# Altium PCB BRAKE PCB PROFILE (Right) V2.PcbDoc
Units mil, origin at the board's own origin, x right, y up, seen from the top; angles counter-clockwise.
Board outline 7818.87 x 3566.84 mil, 2 copper layers (Top Layer, Bottom Layer); 68 components, 67 nets, 266 pads, 5 vias.
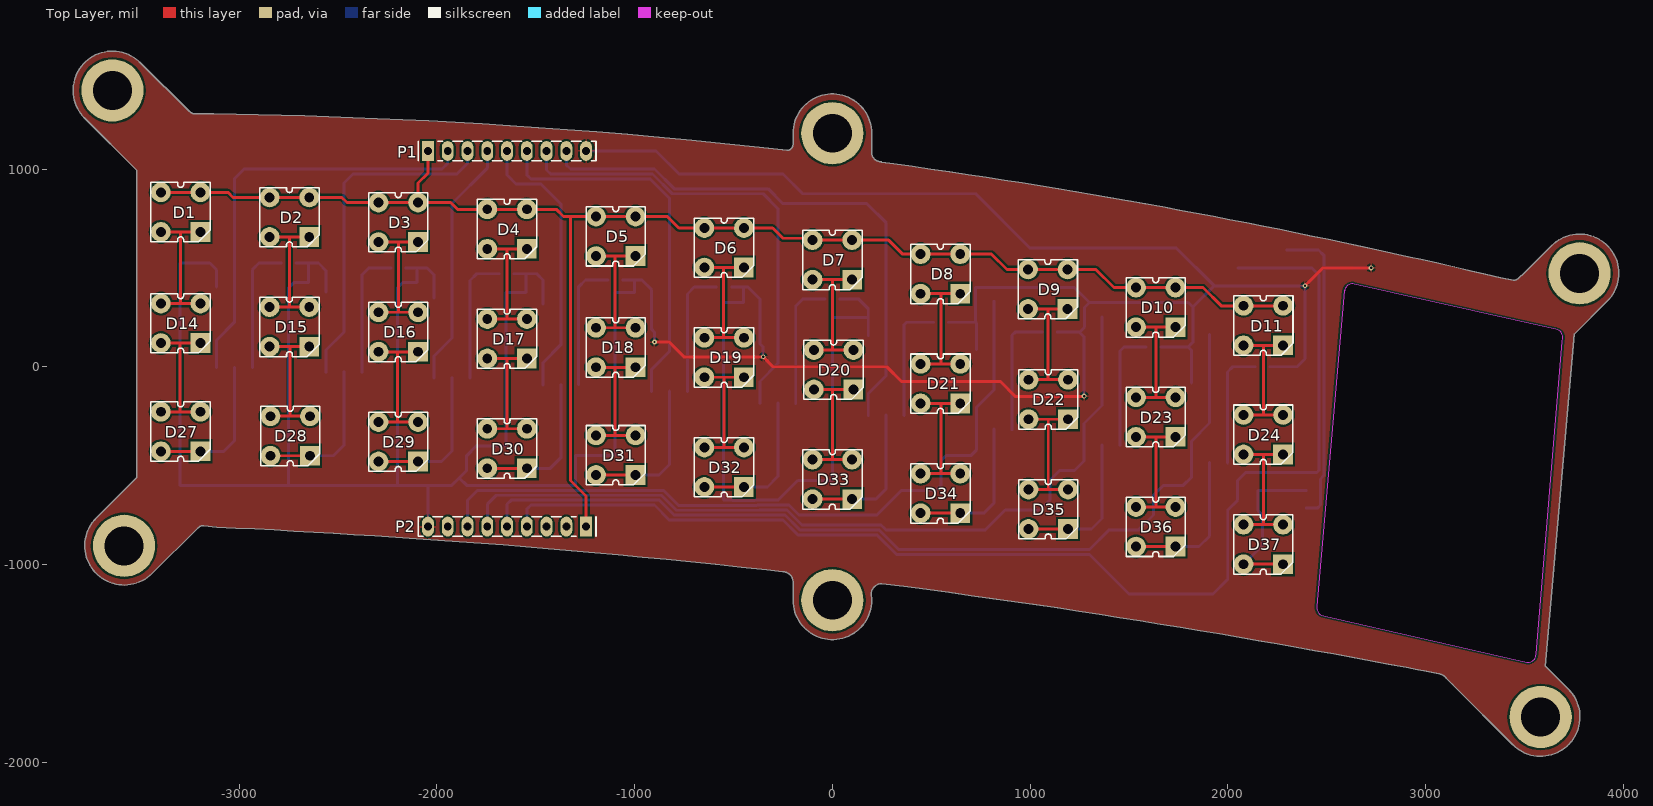
[diagram p0: Top Layer view]
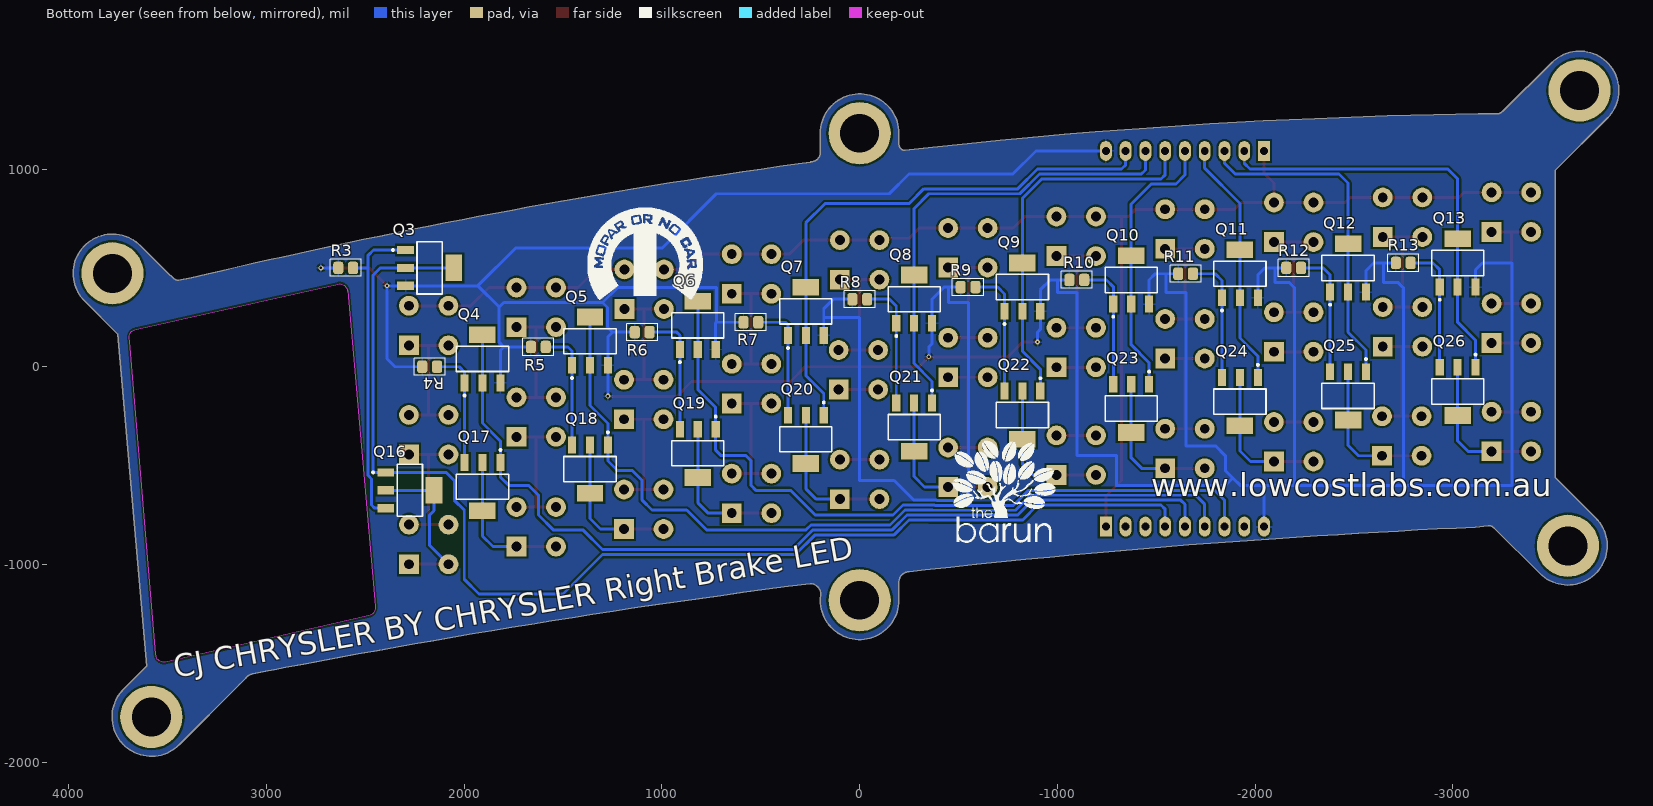
[diagram p1: Bottom Layer view, seen from below]
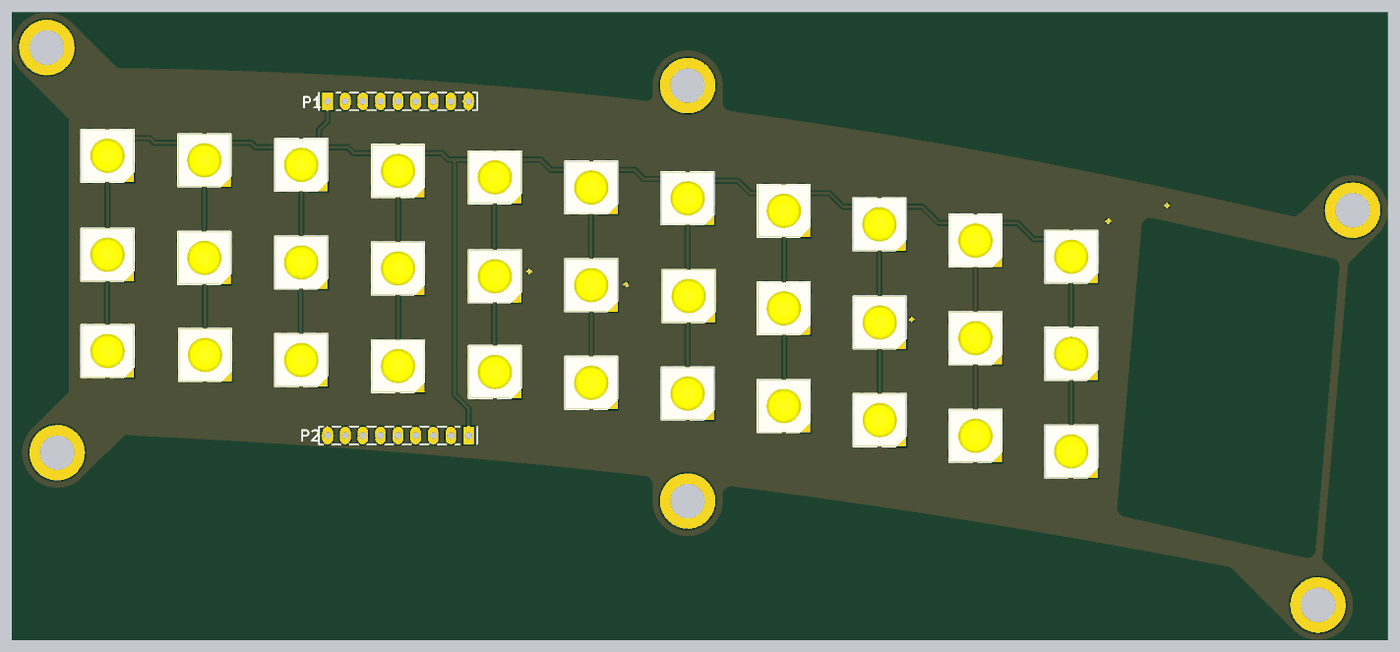
[diagram p2: 3D render of the assembled board from above, using the file's embedded part models]
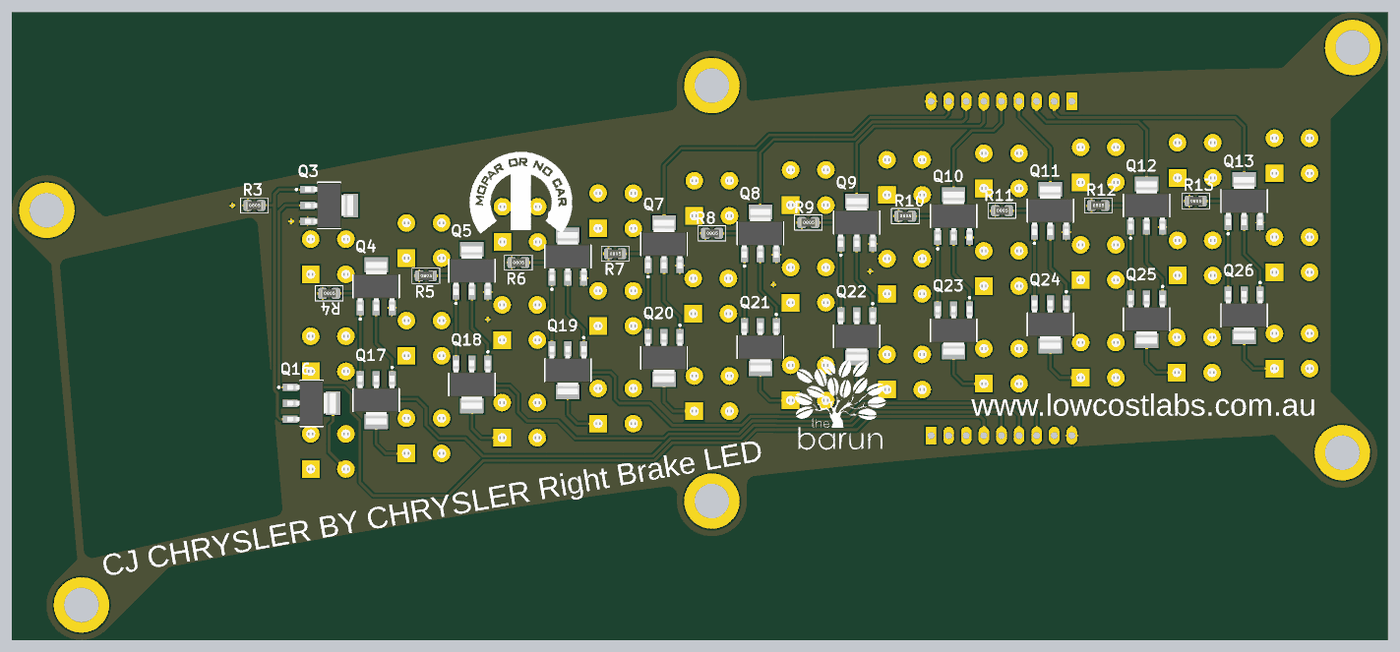
[diagram p3: 3D render of the assembled board from below, using the file's embedded part models]

## Layer stack, top to bottom
Top Solder: solder mask 0.4, Solder Resist, Dk 3.5
Top Layer: signal copper 1.4
Dielectric 1: dielectric 12.6, FR-4, Dk 4.8
Bottom Layer: signal copper 1.4
Bottom Solder: solder mask 0.4, Solder Resist, Dk 3.5

## Board outline
401 vertices, not listed, extent -3840.52,-1970.41 3978.35,1596.43
cut-out: 2476.18,-1256.86 2495.59,-1262.41 3512.96,-1493.74 ccw(c3520,-1455) 3559.37,-1455 3692.71,130.19 3693.83,143.53 ccw(c3655,150) 3659.88,189.07 3645.71,193.19 2639.55,418.19 ccw(c2630,380) 2590.93,384.88 2590,384.96 2451.39,-1212.28 ccw(c2490,-1220)

## Design rules (kind name [scope] priority, off if disabled: settings)
Clearance [All] p1: gap=10
PolygonConnect [All] p1: connectstyle=Relief reliefconductorwidth=10 reliefentries=4 polygonreliefangle="90 Angle" airgapwidth=10
RoomDefinition Indicator [InComponentClass('Indicator')] p1: confinementstyle=ConfineIn formatcopy=TRUE lockcomponents=FALSE outline -4345,-2195 5215,-2195 5215,2075 -4345,2075
RoutingVias [All] p1: holewidth=28 width=50 viastyle="Through Hole" minholewidth=12 minwidth=24 maxholewidth=28 maxwidth=50
SolderMaskExpansion [All] p1: expansion=4
Width [All] p1: maxlimit=100 minlimit=10 preferedwidth=10
30 further rules are at their usual default settings.

## Components (designator, comment, footprint, x,y, rotation, side; value= is the part's Value field where it differs from the comment)
D1 "AMBER" "CREE P4 YELLOW" -3296.96,782.24 r180 top
D2 "AMBER" "CREE P4 YELLOW" -2746.38,756.42 r180 top
D3 "AMBER" "CREE P4 YELLOW" -2195.81,730.61 r180 top
D4 "AMBER" "CREE P4 YELLOW" -1645.69,696.46 r180 top
D5 "AMBER" "CREE P4 YELLOW" -1095.52,659.72 r180 top
D6 "AMBER" "CREE P4 YELLOW" -547.76,601.72 r180 top
D7 "AMBER" "CREE P4 YELLOW" 0,540.4 r180 top
D8 "AMBER" "CREE P4 YELLOW" 546.6,469.46 r180 top
D9 "AMBER" "CREE P4 YELLOW" 1090,392.31 r180 top
D10 "AMBER" "CREE P4 YELLOW" 1635.86,300.24 r180 top
D11 "AMBER" "CREE P4 YELLOW" 2180,208.31 r180 top
D14 "AMBER" "CREE P4 YELLOW" -3296.96,219.72 r180 top
D15 "AMBER" "CREE P4 YELLOW" -2746.38,201.54 r180 top
D16 "AMBER" "CREE P4 YELLOW" -2195.81,175.73 r180 top
D17 "AMBER" "CREE P4 YELLOW" -1645.69,141.58 r180 top
D18 "AMBER" "CREE P4 YELLOW" -1095.52,97.21 r180 top
D19 "AMBER" "CREE P4 YELLOW" -547.76,46.84 r180 top
D20 "AMBER" "CREE P4 YELLOW" 6.11,-15.28 r180 top
D21 "AMBER" "CREE P4 YELLOW" 546.6,-85.42 r180 top
D22 "AMBER" "CREE P4 YELLOW" 1091.91,-165.64 r180 top
D23 "AMBER" "CREE P4 YELLOW" 1635.86,-254.65 r180 top
D24 "AMBER" "CREE P4 YELLOW" 2179.8,-343.65 r180 top
D27 "AMBER" "CREE P4 YELLOW" -3296.96,-327.91 r180 top
D28 "AMBER" "CREE P4 YELLOW" -2742.54,-350.23 r180 top
D29 "AMBER" "CREE P4 YELLOW" -2195.81,-379.54 r180 top
D30 "AMBER" "CREE P4 YELLOW" -1645.69,-413.68 r180 top
D31 "AMBER" "CREE P4 YELLOW" -1095.52,-447.11 r180 top
D32 "AMBER" "CREE P4 YELLOW" -547.76,-508.43 r180 top
D33 "AMBER" "CREE P4 YELLOW" 0,-569.75 r180 top
D34 "AMBER" "CREE P4 YELLOW" 546.6,-640.69 r180 top
D35 "AMBER" "CREE P4 YELLOW" 1091.91,-720.91 r180 top
D36 "AMBER" "CREE P4 YELLOW" 1635.86,-809.91 r180 top
D37 "AMBER" "CREE P4 YELLOW" 2179.8,-898.92 r180 top
P1 "Header 9" "HEADER 1x9" -1645.69,1091.58 r0 top
P2 "Header 9" "HEADER 1x9" -1645.69,-808.42 r180 top
Q3 "BCP56" SOT223 2175,500 r270 bottom
Q4 "BCP56" SOT223 1907.82,40.05 r180 bottom
Q5 "BCP56" SOT223 1363.87,129.05 r180 bottom
Q6 "BCP56" SOT223 818.56,209.27 r180 bottom
Q7 "BCP56" SOT223 271.96,280.21 r180 bottom
Q8 "BCP56" SOT223 -275.8,341.53 r180 bottom
Q9 "BCP56" SOT223 -823.56,402.85 r180 bottom
Q10 "BCP56" SOT223 -1373.73,439.23 r180 bottom
Q11 "BCP56" SOT223 -1923.85,470.42 r180 bottom
Q12 "BCP56" SOT223 -2470.58,499.72 r180 bottom
Q13 "BCP56" SOT223 -3025,525 r180 bottom
Q16 "BCP56" SOT223 2275,-625 r270 bottom
Q17 "BCP56" SOT223 1907.82,-607 r0 bottom
Q18 "BCP56" SOT223 1363.87,-518 r0 bottom
Q19 "BCP56" SOT223 818.56,-437.78 r0 bottom
Q20 "BCP56" SOT223 271.96,-366.84 r0 bottom
Q21 "BCP56" SOT223 -275.8,-305.52 r0 bottom
Q22 "BCP56" SOT223 -823.56,-244.2 r0 bottom
Q23 "BCP56" SOT223 -1373.73,-210.77 r0 bottom
Q24 "BCP56" SOT223 -1923.85,-176.63 r0 bottom
Q25 "BCP56" SOT223 -2470.58,-147.32 r0 bottom
Q26 "BCP56" SOT223 -3025,-125 r0 bottom
R3 "9R1" "RESISTOR 0805" 2600,500 r180 bottom
R4 "9R1" "RESISTOR 0805" 2175,0 r180 bottom
R5 "9R1" "RESISTOR 0805" 1625,100 r180 bottom
R6 "9R1" "RESISTOR 0805" 1100,175 r180 bottom
R7 "9R1" "RESISTOR 0805" 550,225 r180 bottom
R8 "9R1" "RESISTOR 0805" -0.8,341.53 r180 bottom
R9 "9R1" "RESISTOR 0805" -548.56,402.85 r180 bottom
R10 "9R1" "RESISTOR 0805" -1098.73,439.23 r180 bottom
R11 "9R1" "RESISTOR 0805" -1648.85,470.42 r180 bottom
R12 "9R1" "RESISTOR 0805" -2195.58,499.72 r180 bottom
R13 "9R1" "RESISTOR 0805" -2750,525 r180 bottom

## Footprints (in the part's own frame and the unit in brackets; to place one, negate y for a bottom-side part, rotate by r counter-clockwise, add the part's x,y. Pads: shape width x height; smd on the part's side, far side on the other; paste and mask are expansions set on the pad)
"CREE P4 YELLOW" [mil] "CREE P4 YELLOW"
  rect 100x100 hole 50: 1(-100,100)
  round 100 hole 50: 2(-100,-100) 3(100,-100) 4(100,100)
  silkscreen extent -150,-150 150,150, body extent -150,-150 150,150, height 272
"HEADER 1x9" [mil]
  rect 60x100 hole 40: 1(-400,0)
  oval 60x100 hole 40: 2(-300,0) 3(-200,0) 4(-100,0) 5(0,0) 6(100,0) 7(200,0) 8(300,0) 9(400,0)
  silkscreen extent -450,-50 450,50
"RESISTOR 0805" [mm]
  rrect50% 1.3x1.6 smd: 1(-0.95,0) 2(0.95,0)
  silkscreen extent -2,-1.1 2,1.1, body extent -1.25,-0.62 1.25,0.62, height 0.8
SOT223 [mm] "SOT-223/SC-73; 4 Leads; Body 6.7 x 7.3 mm, inc. leads (LxW max)"
  rect 1.05x2.15 smd: 1(-2.3,-3.1) 2(0,-3.1) 3(2.3,-3.1)
  rect 3.4x2.15 smd: 2(0,3.1)
  silkscreen extent -3.35,-4.85 3.35,1.62, body extent -3.25,-3.5 3.25,3.5, height 1.67

## Part data
D1 D2 D3 D4 D5 D6 D7 D8 D9 D10 D11 D14 D15 D16 D17 D18 D19 D20 D21 D22 D23 D24 D27 D28 D29 D30 D31 D32 D33 D34 D35 D36 D37: library part CP41B-AFSCM0Q0264, "CREE AMBER LED P4 (SUPERFLUX)"
P1 P2: "Header, 9-Pin"
Q3 Q4 Q5 Q6 Q7 Q8 Q9 Q10 Q11 Q12 Q13 Q16 Q17 Q18 Q19 Q20 Q21 Q22 Q23 Q24 Q25 Q26: library part NPN, "BCP56 80 V, 1 A NPN medium power transistors"
R3 R4 R5 R6 R7 R8 R9 R10 R11 R12 R13: library part Res2, "Resistor"

## Free pads (board coordinates)
  round 314.96 hole 196.85 unplated: MOUNT(-3641.73,1397.64) MOUNT(-3582.99,-905.93) MOUNT(0,-1181.1) MOUNT(0,1181.1) MOUNT(3582.68,-1771.65) MOUNT(3779.53,472.44)

## Via types
v1: diameter 24, hole 12, Top Layer to Bottom Layer, 5 vias

## Nets (pads, with @x,y where several pads share a name; then routed paths per layer and width w, separated by ;. In a path a pad name is that pad's centre, name@x,y a point inside that pad or via, vN(x,y) a via of type N, cw(c..) or ccw(c..) an arc to the next point about the centre after c; other vN are vias at no path point)
DRIVE_0: P1.2 Q13.2 Q26.1 | length 2164.9
  Bottom Layer w15: Q26.1 -3115.55,134.45 -3025,225 -3025,402.95 -3025,647.05 -3025,950 -2975,1000 -1975,1000 -1945.69,1029.31 P1.2
DRIVE_1: P1.3 Q12.2 Q25.1 | length 1723.7
  Bottom Layer w15: Q25.1@-2561.13,-28.23 -2561.13,84.17 -2470.58,174.72 -2470.58,377.68 -2470.58,621.77 -2470.58,929.42 -2425,975 -1900,975 -1845.69,1029.31 P1.3
DRIVE_2: P1.4 Q11.2 Q24.1 | length 1260.4
  Bottom Layer w15: Q24.1@-2014.4,-57.53 -2014.4,54.87 -1923.85,145.42 -1923.85,348.37 -1923.85,592.47 -1923.85,826.15 -1745.69,1004.31 P1.4
DRIVE_3: P1.5 Q10.2 Q23.1 | length 1403.7
  Bottom Layer w15: P1.5 -1645.69,970.69 -1600,925 -1475,925 -1373.73,823.73 -1373.73,561.27 Q10.2@-1373.73,317.18 ; Q23.1@-1464.28,-91.68 -1464.28,20.72 -1373.73,111.27 Q10.2@-1373.73,314.23
DRIVE_4: P1.6 Q9.2 Q22.1 | length 1907.3
  Bottom Layer w15: P1.6 -1545.69,970.69 -1525,950 -920.71,950 -823.56,852.85 -823.56,524.9 -823.56,280.8 -823.56,77.85 -914.11,-12.7 Q22.1@-914.11,-125.1
DRIVE_5: P1.7 Q8.2 Q21.1 | length 2371.2
  Bottom Layer w15: P1.7 -1445.69,995.69 -1425,975 -910.36,975 -810.36,875 -350,875 -275.8,800.8 -275.8,463.58 -275.8,219.48 -275.8,16.53 -366.35,-74.02 Q21.1@-366.35,-186.42
DRIVE_6: P1.8 Q7.2 Q20.1 | length 2823
  Bottom Layer w15: P1.8 -1345.69,1020.69 -1325,1000 -900,1000 -800,900 -325,900 -250,825 175,825 271.96,728.04 271.96,402.26 271.96,158.16 271.96,-44.79 181.41,-135.34 Q20.1@181.41,-247.74
DRIVE_7: P2.7 Q6.2 Q19.1 | length 3780.3
  Bottom Layer w15: P2.7 -1845.69,-675 -1795.69,-625 -854.29,-625 -778.36,-700.93 -380.16,-700.93 -379.23,-700 -218.93,-700 -168.93,-750 225,-750 350,-625 525,-625 550,-600 550,-475 575,-450 700,-450 728.01,-421.99 Q19.1 728.01,-206.28 818.56,-115.73 818.56,87.22 Q6.2@818.56,331.32
DRIVE_8: P2.6 Q5.2 Q18.1 | length 4192.1
  Bottom Layer w15: P2.6 -1745.69,-695.69 -1700,-650 -864.64,-650 -788.72,-725.93 -369.8,-725.93 -368.87,-725 -229.29,-725 -154.29,-800 245.71,-800 270.71,-825 775,-825 875,-725 1050,-725 1100,-675 1100,-575 1150,-525 1225,-525 1273.32,-476.68 Q18.1 1273.32,-286.5 1363.87,-195.95 1363.87,7 Q5.2@1363.87,251.1
DRIVE_9: P2.5 Q4.2 Q17.1 | length 4656.6
  Bottom Layer w15: P2.5 -1645.69,-695.69 -1625,-675 -875,-675 -799.07,-750.93 -359.44,-750.93 -358.52,-750 -239.64,-750 -164.64,-825 235.36,-825 335.36,-925 1300,-925 1400,-825 1550,-825 1625,-750 1625,-650 1675,-600 1775,-600 1817.26,-557.74 Q17.1 1817.26,-375.51 1907.82,-284.95 1907.82,-82 Q4.2@1907.82,162.09
DRIVE_10: P2.4 Q3.2 Q16.1 | length 6224.4
  Bottom Layer w15: P2.4 -1545.69,-720.69 -1525,-700 -900,-700 -824.07,-775.93 -349.09,-775.93 -348.16,-775 -250,-775 -175,-850 225,-850 325,-950 1300,-950 1500,-1150 1925,-1150 2000,-1075 2000,-725 2050,-675 2050,-575 2090.55,-534.45 Q16.1 2451.42,-534.45 2460.87,-525 2460.87,464.13 2425,500 2297.05,500 Q3.2@2052.95,500
DRIVE_11: P2.3
DRIVE_12: P2.2
GND: P1.9 P2.9 Q3.3 Q4.3 Q5.3 Q6.3 Q7.3 Q8.3 Q9.3 Q10.3 Q11.3 Q12.3 Q13.3 R3.1 R4.1 R5.1 R6.1 R7.1 R8.1 R9.1 R10.1 R11.1 R12.1 R13.1 | length 23642.8
  Top Layer w15: v1(-900,125) -825,125 -750,50 v1(-350,50) -300,0 275,0 350,-75 850,-75 925,-150 v1@1273.32,-150 ; v1(2390.55,409.45) 2481.1,500 v1(2725,500)
  Bottom Layer w15: Q13.3 -3115.55,490.55 -3150,525 -3300,525 -3300,-600 -2750,-600 ; R13.1 -2650,525 ; Q12.3 -2561.13,486.13 -2600,525 -2650,525 ; R12.1 -2100,499.72 ; P2.9 -2045.69,-604.31 ; Q11.3 -2014.4,464.4 -2049.72,499.72 -2100,499.72 ; R11.1 -1550,470.42 ; Q10.3 -1464.28,439.28 -1495.42,470.42 -1550,470.42 ; P1.9 -891.58,1091.58 -775,975 -250,975 -150,875 725,875 1000,600 1740.68,600 1931.23,409.45 ; R10.1 -1000,439.23 ; v1(-900,125) -900,175 -914.11,189.11 Q9.3 -914.11,389.11 -964.23,439.23 -1000,439.23 ; R9.1 -450,402.85 ; v1(-350,50) -350,100 -366.35,116.35 Q8.3 -366.35,341.35 -427.85,402.85 -450,402.85 ; R8.1 133.47,341.53 181.41,293.59 181.41,250 ; Q7.3 181.41,250 ; R7.1 725,225 ; Q6.3 728.01,221.99 725,225 ; R6.1 1250,175 ; v1(1273.32,-148.32) Q5.3 1273.32,151.68 1250,175 ; R5.1 1800,100 ; Q4.3 1817.27,82.73 1800,100 ; R4.1 2350,0 2390.55,40.55 v1(2390.55,409.45) Q3.3 1931.23,409.45 ; R3.1 v1(2725,500) ; -2750,-600 -2200,-600 ; -2750,-600 -2750,400 -2725,425 -2650,425 -2650,525 ; -2200,-600 -1925,-600 -1887.5,-562.5 ; -2200,-600 -2200,400 -2175,425 -2100,425 -2100,499.72 ; -1887.5,-562.5 -1850,-525 -1850,-450 -1800,-400 -1650,-400 -1650,375 -1550,375 -1550,470.42 ; -1887.5,-562.5 -1850,-600 -1300,-600 -1300,-450 -1100,-450 -1100,375 -1000,375 -1000,439.23 ; -450,402.85 -450,325 -550,325 -550,-675 -505.93,-675 -505.01,-675.93 -390.51,-675.93 -389.58,-675 -275,-675 -175,-575 0,-575 0,250 181.41,250 ; 725,225 725,400 1225,400 1300,325 ; 1250,175 1275,200 1275,300 1300,325 ; 1300,325 1800,325 1823.39,301.61 ; 1800,100 1823.39,123.39 1823.39,301.61 ; 1823.39,301.61 1931.23,409.45
NetD1_1: D1.1 D1.4 D14.2 D14.3 | length 762.5
  Top Layer w15: D14.3 -3296.96,319.72 ; D1.4 -3296.96,682.24 ; D14.2 -3296.96,319.72 ; D1.1 -3296.96,682.24 ; -3296.96,319.72 -3296.96,682.24
NetD2_1: D2.1 D2.4 D15.2 D15.3 | length 751.3
  Top Layer w15: D15.3 -2746.38,301.54 ; D2.4 D2.1 ; -2746.38,652.81 -2746.38,301.54 ; D15.2 -2746.38,301.54
NetD3_1: D3.1 D3.4 D16.2 D16.3 | length 750.7
  Top Layer w15: D16.3 D16.2 ; D3.4 -2195.81,630.61 ; -2195.81,279.92 -2195.81,630.61 ; D3.1 -2195.81,630.61
NetD4_1: D4.1 D4.4 D17.2 D17.3 | length 754.9
  Top Layer w15: D17.3 -1645.69,241.58 ; D4.4 -1645.69,596.46 ; D17.2 -1645.69,241.58 ; D4.1 -1645.69,596.46 ; -1645.69,241.58 -1645.69,596.46
NetD5_1: D5.1 D5.4 D18.2 D18.3 | length 762.5
  Top Layer w15: D18.3 -1100,197.21 ; D5.4 -1100,559.72 ; D18.2 -1100,197.21 ; D5.1 -1100,559.72 ; -1100,197.21 -1100,559.72
NetD6_1: D6.1 D6.4 D19.2 D19.3 | length 752.6
  Top Layer w15: D19.3 D19.2 ; D6.4 -550,501.72 ; -550,149.08 -550,501.72 ; D6.1 -550,501.72
NetD7_1: D7.1 D7.4 D20.2 D20.3 | length 755.7
  Top Layer w15: D7.4 0,440.4 ; D20.3 0,84.72 ; D7.1 0,440.4 ; D20.2 0,84.72 ; 0,84.72 0,440.4
NetD8_1: D8.1 D8.4 D21.2 D21.3 | length 754.9
  Top Layer w15: D21.3 550,14.58 ; D8.4 550,369.46 ; D21.2 550,14.58 ; D8.1 550,369.46 ; 550,14.58 550,369.46
NetD9_1: D9.1 D9.4 D22.2 D22.3 | length 756
  Top Layer w15: D9.4 1090,292.31 ; D22.3 D22.2 ; 1090,-63.73 1090,292.31 ; D9.1 1090,292.31
NetD10_1: D10.1 D10.4 D23.2 D23.3 | length 754.9
  Top Layer w15: D23.3 1635.86,-154.65 ; D10.4@1535.86,200 1635.86,200 ; D23.2 1635.86,-154.65 ; D10.1 1635.86,200.24 1635.86,200 ; 1635.86,-154.65 1635.86,200
NetD11_1: D11.1 D11.4 D24.2 D24.3 | length 751.8
  Top Layer w15: D24.3 D24.2 ; D11.4 2180,108.31 ; 2180,-243.46 2180,108.31 ; D11.1 2180,108.31
NetD12_1: 
NetD13_1: 
NetD14_1: D14.1 D14.4 D27.2 D27.3 | length 744.6
  Top Layer w15: D27.3 -3300,-227.91 ; D14.4 D14.1 ; -3300,116.68 -3300,-227.91 ; D27.2 -3300,-227.91
NetD15_1: D15.1 D15.4 D28.2 D28.3 | length 747.9
  Top Layer w15: D15.4 D15.1 ; D28.3 -2742.54,-250.23 ; -2742.54,97.7 -2742.54,-250.23 ; D28.2 -2742.54,-250.23
NetD16_1: D16.1 D16.4 D29.2 D29.3 | length 751.1
  Top Layer w15: D29.3 D29.2 ; D16.4 -2200,75.73 ; -2200,-275.34 -2200,75.73 ; D16.1 -2200,75.73
NetD17_1: D17.1 D17.4 D30.2 D30.3 | length 755.3
  Top Layer w15: D30.3 -1645.69,-313.68 ; D17.4 -1645.69,41.58 ; D30.2 -1645.69,-313.68 ; D17.1 -1645.69,41.58 ; -1645.69,-313.68 -1645.69,41.58
NetD18_1: D18.1 D18.4 D31.2 D31.3 | length 744.3
  Top Layer w15: D31.3 -1100,-347.11 ; D18.4 -1100,-2.79 ; D31.2 -1100,-347.11 ; D18.1 -1100,-2.79 ; -1100,-347.11 -1100,-2.79
NetD19_1: D19.1 D19.4 D32.2 D32.3 | length 753
  Top Layer w15: D32.3 -547.76,-408.43 ; D19.4 D19.1 ; -547.76,-55.4 -547.76,-408.43 ; D32.2 -547.76,-408.43
NetD20_1: D20.1 D20.4 D33.2 D33.3 | length 754.5
  Top Layer w15: D33.3 0,-469.75 ; D20.4 0,-115.28 ; D33.2 0,-469.75 ; D20.1 0,-115.28 ; 0,-469.75 0,-115.28
NetD21_1: D21.1 D21.4 D34.2 D34.3 | length 755.3
  Top Layer w15: D34.3 550,-540.69 ; D21.4 550,-185.42 ; D34.2 550,-540.69 ; D21.1 550,-185.42 ; 550,-540.69 550,-185.42
NetD22_1: D22.1 D22.4 D35.2 D35.3 | length 755.3
  Top Layer w15: D35.3 1091.91,-620.91 ; D22.4 1091.91,-265.64 ; D35.2 1091.91,-620.91 ; D22.1 1091.91,-265.64 ; 1091.91,-620.91 1091.91,-265.64
NetD23_1: D23.1 D23.4 D36.2 D36.3 | length 755.3
  Top Layer w15: D36.3 1635.86,-709.91 ; D23.4 1635.86,-354.65 ; D36.2 1635.86,-709.91 ; D23.1 1635.86,-354.65 ; 1635.86,-709.91 1635.86,-354.65
NetD24_1: D24.1 D24.4 D37.2 D37.3 | length 755.3
  Top Layer w15: D37.3 2179.8,-798.92 ; D24.4 2179.8,-443.65 ; D37.2 2179.8,-798.92 ; D24.1 2179.8,-443.65 ; 2179.8,-798.92 2179.8,-443.65
NetD25_1: 
NetD26_1: 
NetQ1_1: 
NetQ2_1: 
NetQ3_1: Q3.1 Q16.3 R3.2 | length 1625.7
  Bottom Layer w15: Q3.1 2459.45,590.55 2485.87,564.13 2485.87,500 ; Q16.3 2453,-715.55 2468.55,-700 2468.55,-567.33 2485.87,-550 2485.87,500 ; R3.2 2485.87,500
NetQ4_1: Q4.1 Q17.3 R4.2 | length 611.5
  Bottom Layer w15: Q17.3@1998.37,-487.9 Q4.1 1998.37,-26.63 2025,0 R4.2
NetQ5_1: Q5.1 Q18.3 R5.2 | length 620
  Bottom Layer w15: Q18.3@1454.42,-398.9 Q5.1 1454.42,79.42 1475,100 R5.2
NetQ6_1: Q6.1 Q19.3 R6.2 | length 637.9
  Bottom Layer w15: Q19.3@909.11,-318.68 Q6.1 909.11,159.11 925,175 R6.2
NetQ7_1: Q7.1 Q20.3 R7.2 | length 615.5
  Bottom Layer w15: Q20.3@362.51,-247.74 Q7.1 362.51,212.51 375,225 R7.2
NetQ8_1: Q8.1 Q21.3 R8.2 | length 654.8
  Bottom Layer w15: Q21.3@-185.25,-186.42 Q8.1 -185.25,307.08 -150.8,341.53 R8.2
NetQ9_1: Q9.1 Q22.3 R9.2 | length 654.8
  Bottom Layer w15: Q22.3@-733.01,-125.1 Q9.1 -733.01,368.4 -698.56,402.85 R9.2
NetQ10_1: Q10.1 Q23.3 R10.2 | length 654.8
  Bottom Layer w15: Q23.3 Q10.1 -1283.17,404.78 -1248.73,439.23 R10.2
NetQ11_1: Q11.1 Q24.3 R11.2 | length 654.8
  Bottom Layer w15: Q24.3@-1833.3,-57.53 Q11.1 -1833.3,435.97 -1798.85,470.42 R11.2
NetQ12_1: Q12.1 Q25.3 R12.2 | length 654.8
  Bottom Layer w15: Q25.3@-2380.03,-28.23 Q12.1 -2380.03,465.28 -2345.58,499.72 R12.2
NetQ13_1: Q13.1 Q26.3 R13.2 | length 654.8
  Bottom Layer w15: Q26.3 Q13.1 -2934.45,490.55 -2900,525 R13.2
SINK_0: D27.1 D27.4 Q26.2 | length 765.9
  Top Layer w15: D27.4 D27.1
  Bottom Layer w15: D27.1 -3077.91,-427.91 -3025,-375 -3025,-247.05 Q26.2@-3025,-2.95
SINK_1: D28.1 D28.4 Q25.2 | length 965.9
  Top Layer w15: D28.4 D28.1 D28.4
  Bottom Layer w15: D28.1 -2523.49,-450.23 -2470.58,-397.32 -2470.58,-269.37 Q25.2@-2470.58,-25.28
SINK_2: D29.1 D29.4 Q24.2 | length 965.9
  Top Layer w15: D29.4 D29.1 D29.4
  Bottom Layer w15: D29.1 -1976.76,-479.54 -1923.85,-426.63 -1923.85,-298.68 Q24.2@-1923.85,-54.58
SINK_3: D30.1 D30.4 Q23.2 | length 965.9
  Top Layer w15: D30.4 D30.1 D30.4
  Bottom Layer w15: D30.1 -1426.63,-513.68 -1373.73,-460.77 -1373.73,-332.82 Q23.2@-1373.73,-88.73
SINK_4: D31.1 D31.4 Q22.2 | length 965.9
  Top Layer w15: D31.4 D31.1 D31.4
  Bottom Layer w15: D31.1 -876.47,-547.11 -823.56,-494.2 -823.56,-366.24 Q22.2@-823.56,-122.15
SINK_5: D32.1 D32.4 Q21.2 | length 965.9
  Top Layer w15: D32.4 D32.1 D32.4
  Bottom Layer w15: D32.1 -328.71,-608.43 -275.8,-555.52 -275.8,-427.57 Q21.2@-275.8,-183.47
SINK_6: D33.1 D33.4 Q20.2 | length 965.9
  Top Layer w15: D33.4 D33.1 D33.4
  Bottom Layer w15: D33.1 219.05,-669.75 271.96,-616.84 271.96,-488.89 Q20.2@271.96,-244.79
SINK_7: D34.1 D34.4 Q19.2 | length 965.9
  Top Layer w15: D34.4 D34.1 D34.4
  Bottom Layer w15: D34.1 765.65,-740.69 818.56,-687.78 818.56,-559.82 Q19.2@818.56,-315.73
SINK_8: D35.1 D35.4 Q18.2 | length 965.9
  Top Layer w15: D35.4 D35.1 D35.4
  Bottom Layer w15: D35.1 1310.96,-820.91 1363.87,-768 1363.87,-640.04 Q18.2@1363.87,-395.95
SINK_9: D36.1 D36.4 Q17.2 | length 965.9
  Top Layer w15: D36.4 D36.1 D36.4
  Bottom Layer w15: D36.1 1854.91,-909.91 1907.82,-857 1907.82,-729.05 Q17.2@1907.82,-484.95
SINK_10: D37.1 D37.4 Q16.2 | length 866.6
  Top Layer w15: D37.4 D37.1
  Bottom Layer w15: D37.4 2175,-903.72 2175,-750 2152.95,-727.95 2152.95,-625 Q16.2@2397.05,-625
SINK_11: 
SINK_12: 
V+: D1.2 D1.3 D2.2 D2.3 D3.2 D3.3 D4.2 D4.3 D5.2 D5.3 D6.2 D6.3 D7.2 D7.3 D8.2 D8.3 D9.2 D9.3 D10.2 D10.3 D11.2 D11.3 P1.1 P2.1 | length 7997.4
  Top Layer w15: D1.3 D1.2 -3057.24,882.24 -3031.42,856.42 D2.3 D2.2 -2481.42,856.42 -2455.61,830.61 D3.3 D3.2 ; P1.1 -2045.69,979.31 -2095.81,929.19 D3.2 ; P2.1 -1245.69,-654.31 -1325,-575 -1325,759.72 ; D10.3@1525,400 D10.2@1725,400 ; D11.2 D11.3 1966.69,308.31 1874.76,400.24 D10.2 D10.3 1424.76,400.24 1332.69,492.31 D9.2 D9.3 882.69,492.31 805.54,569.46 D8.2 D8.3 355.54,569.46 284.6,640.4 D7.2 D7.3 -109.6,650 -250,650 -301.72,701.72 D6.2 D6.3 -776.72,701.72 -834.72,759.72 D5.2 D5.3 -1325,759.72 ; D3.2 -1930.61,830.61 -1896.46,796.46 D4.3 D4.2 -1396.46,796.46 -1359.72,759.72 -1325,759.72
pads on no net: P2.8

## Polygon pours and split planes (outlines as drawn)
GND on Top Layer "TOP GND" (solid, remove dead copper, pour order 0): 401 vertices, not listed, extent -3840.52,-1970.41 3978.35,1596.43
GND on Bottom Layer "BOTTOM GND" (solid, remove dead copper, pour order 1): 401 vertices, not listed, extent -3840.52,-1970.41 3978.35,1596.43

## Silkscreen, mask and mechanical layers (free items; w line width, h text height)
Bottom Overlay:
  drawing of 48 lines, arcs and shapes, not listed
  text "www.lowcostlabs.com.au" at -1475,-695 h200
  text "CJ CHRYSLER BY CHRYSLER Right Brake LED" at 3455,-1610 h196.85 r350
Mechanical 1:
  drawing of 162 lines, arcs and shapes, not listed
Mechanical 2:
  drawing of 1263 lines, arcs and shapes, not listed
Mechanical 13:
  lines w10: -2895.69,-808.42 -395.69,-808.42 ; -2895.69,1091.58 -395.69,1091.58 ; -1745.69,141.58 -1645.69,141.58 ; -1645.69,-808.42 -1645.69,1091.58 ; -1645.69,29.31 -1645.69,141.58 ; -1645.69,245.69 -1645.69,141.58 ; -1545.69,141.58 -1645.69,141.58